# Altium PCB BSPD_V1.1.PcbDoc
Units mm, origin at the board's own origin, x right, y up, seen from the top; angles counter-clockwise.
Board outline 62 x 53 mm, 4 copper layers (Top Copper, Signal Layer 1, Signal Layer 2, Bottom Copper), stack 1.57 mm thick; 59 components, 38 nets, 194 pads, 116 vias.
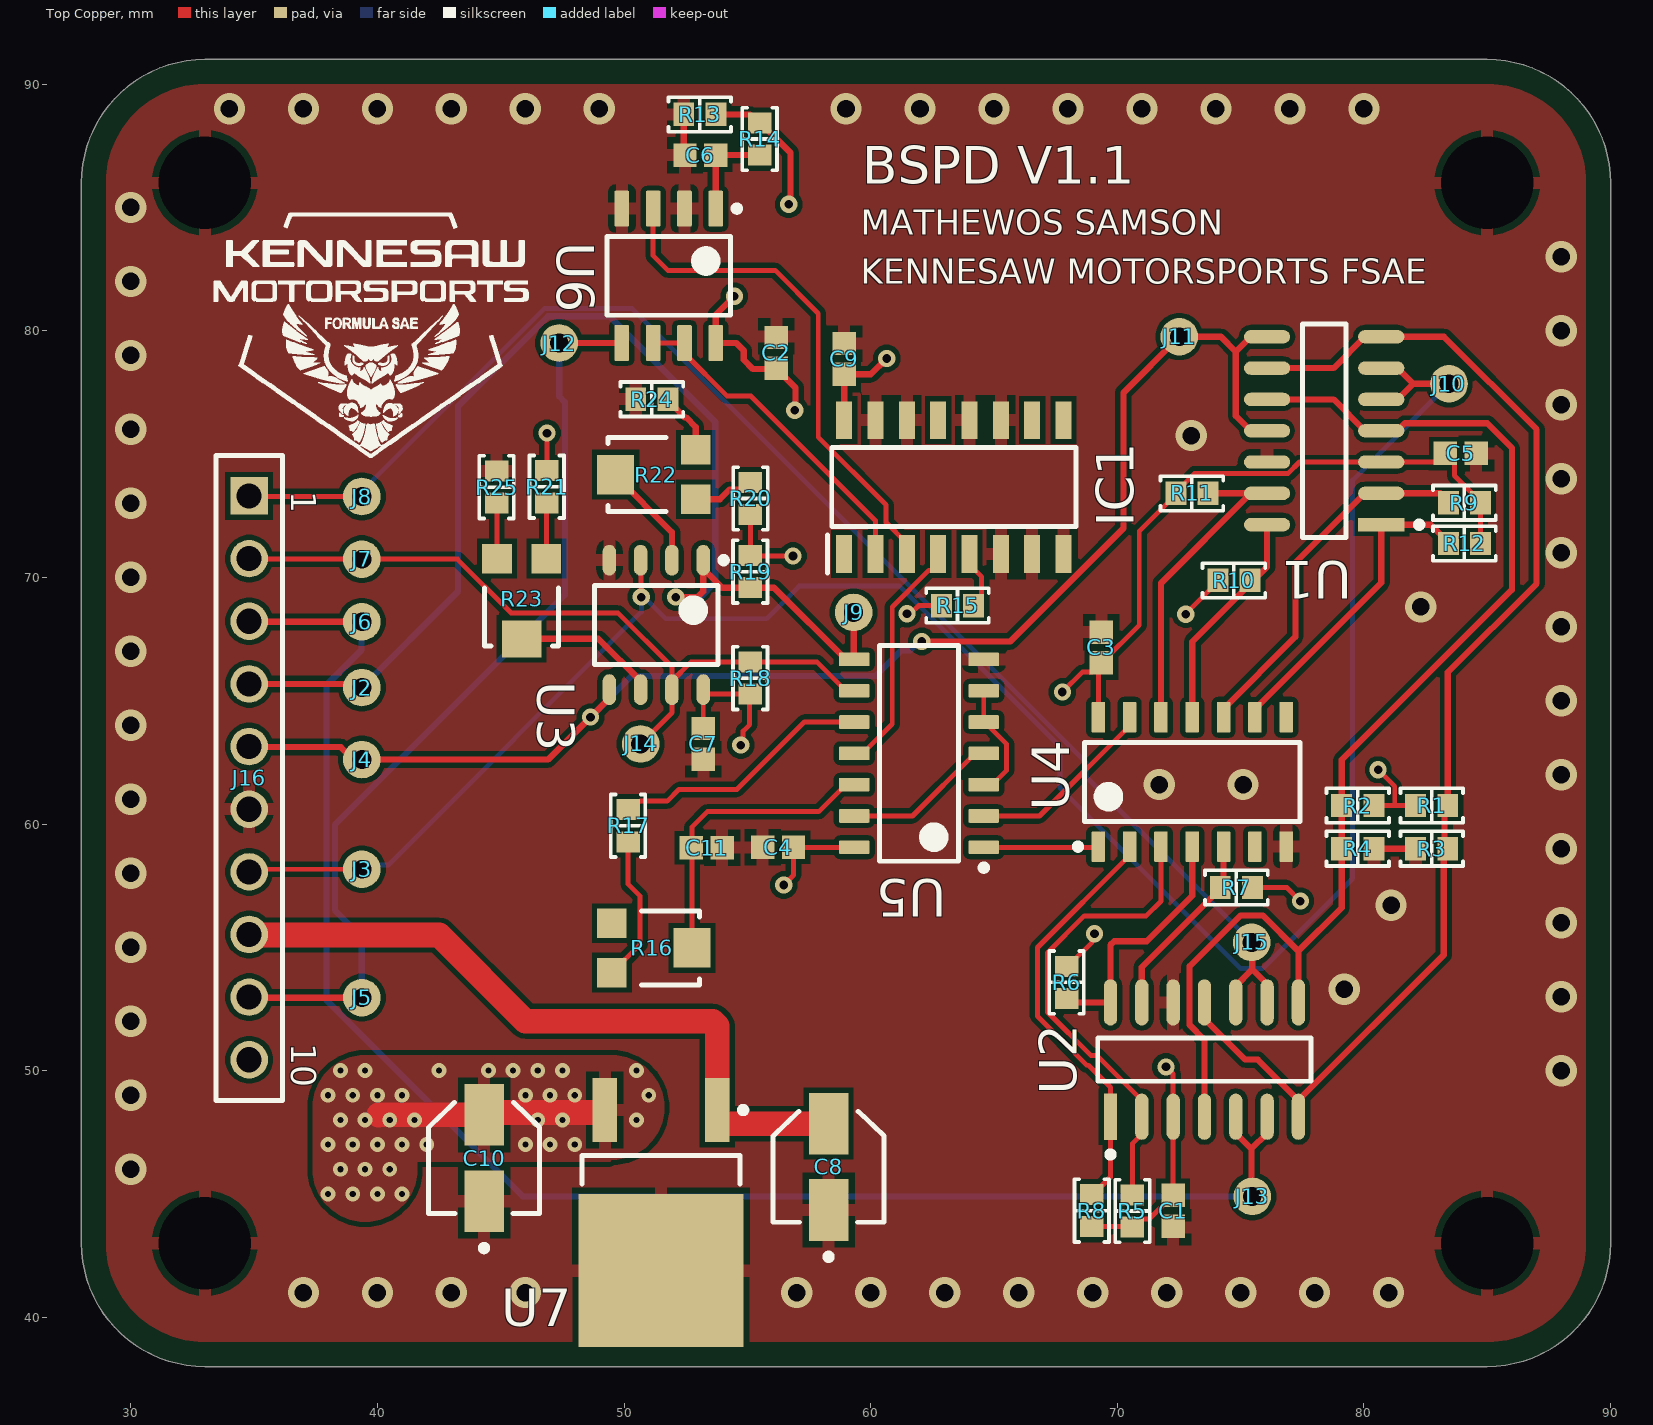
[diagram p0: Top Copper view]
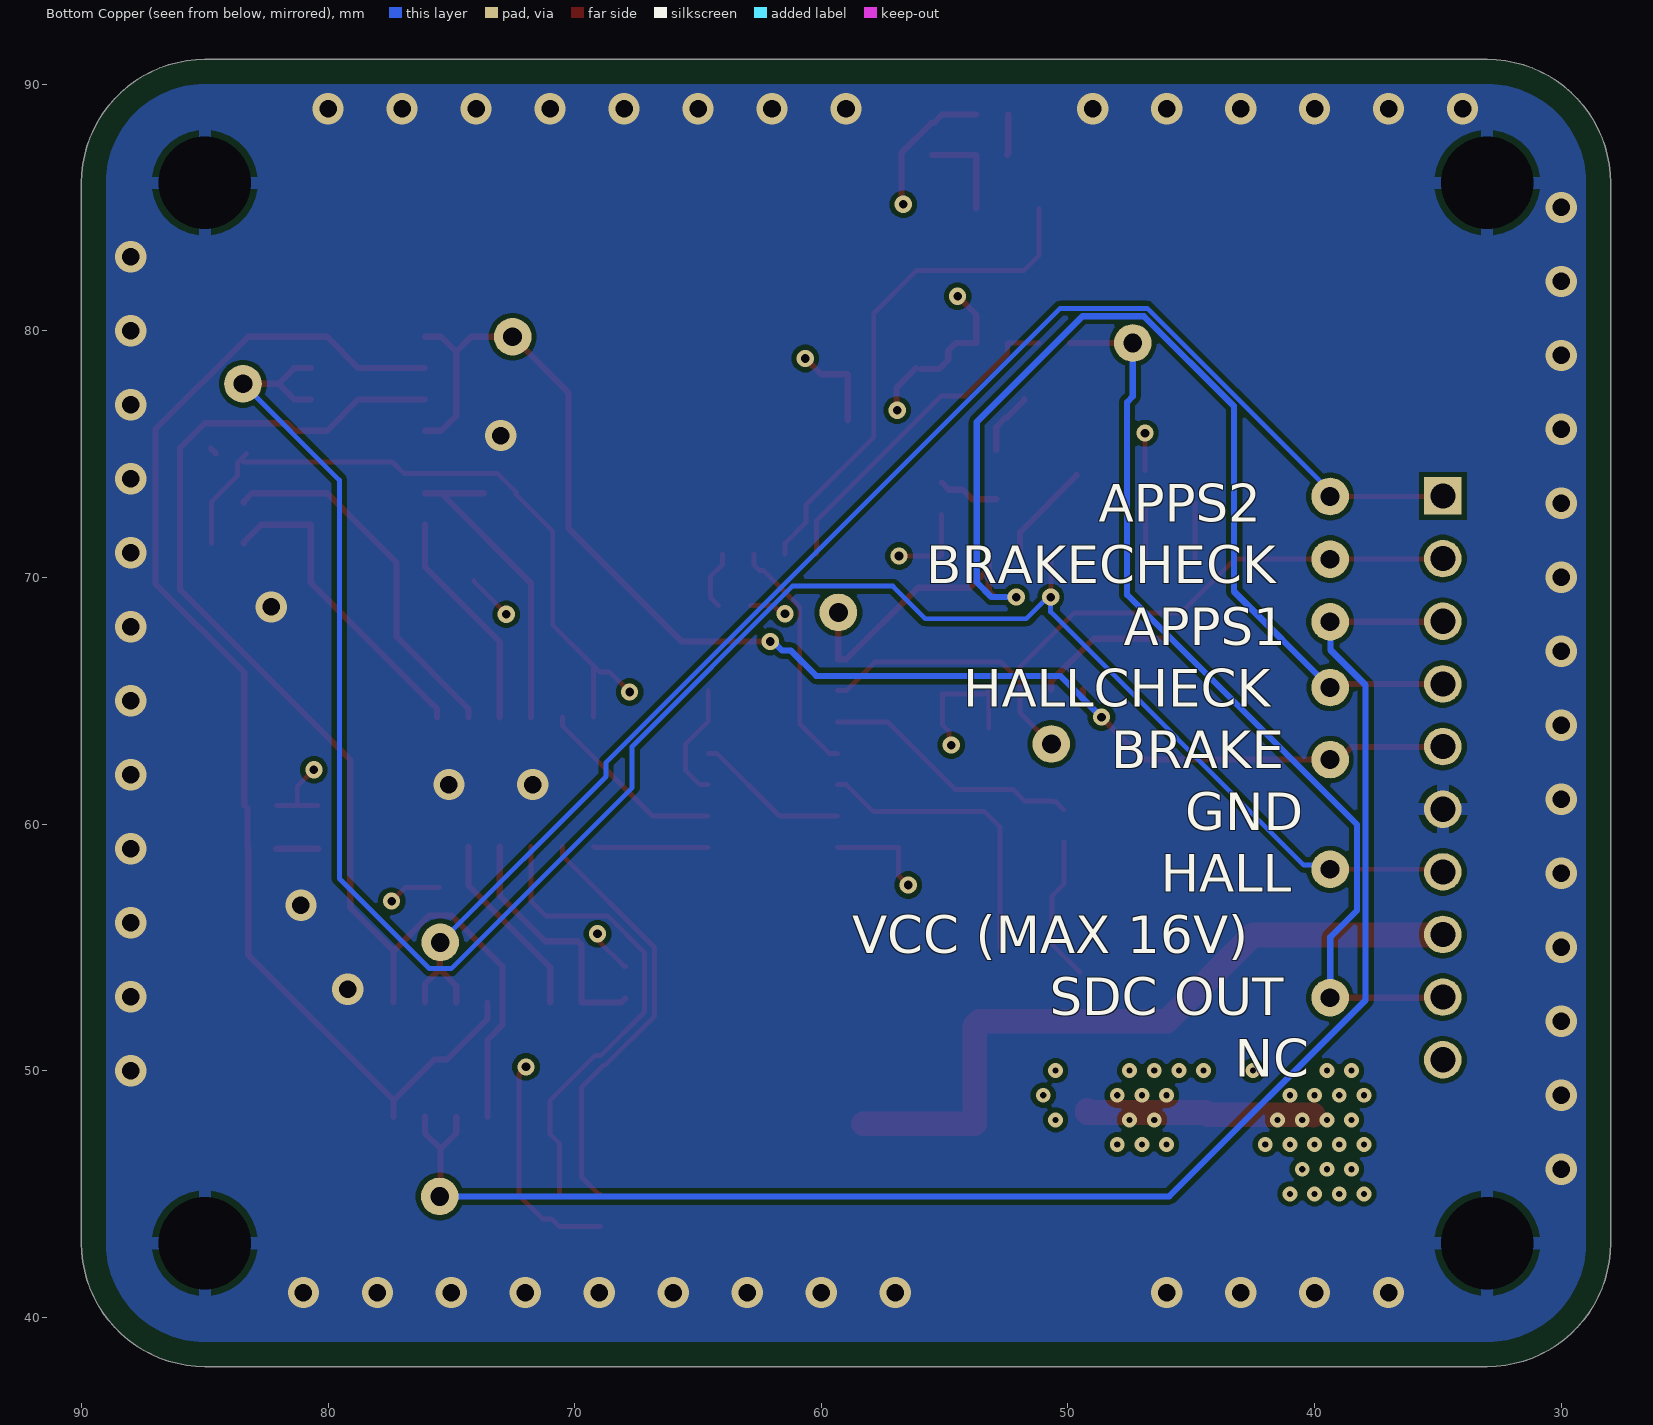
[diagram p1: Bottom Copper view, seen from below]
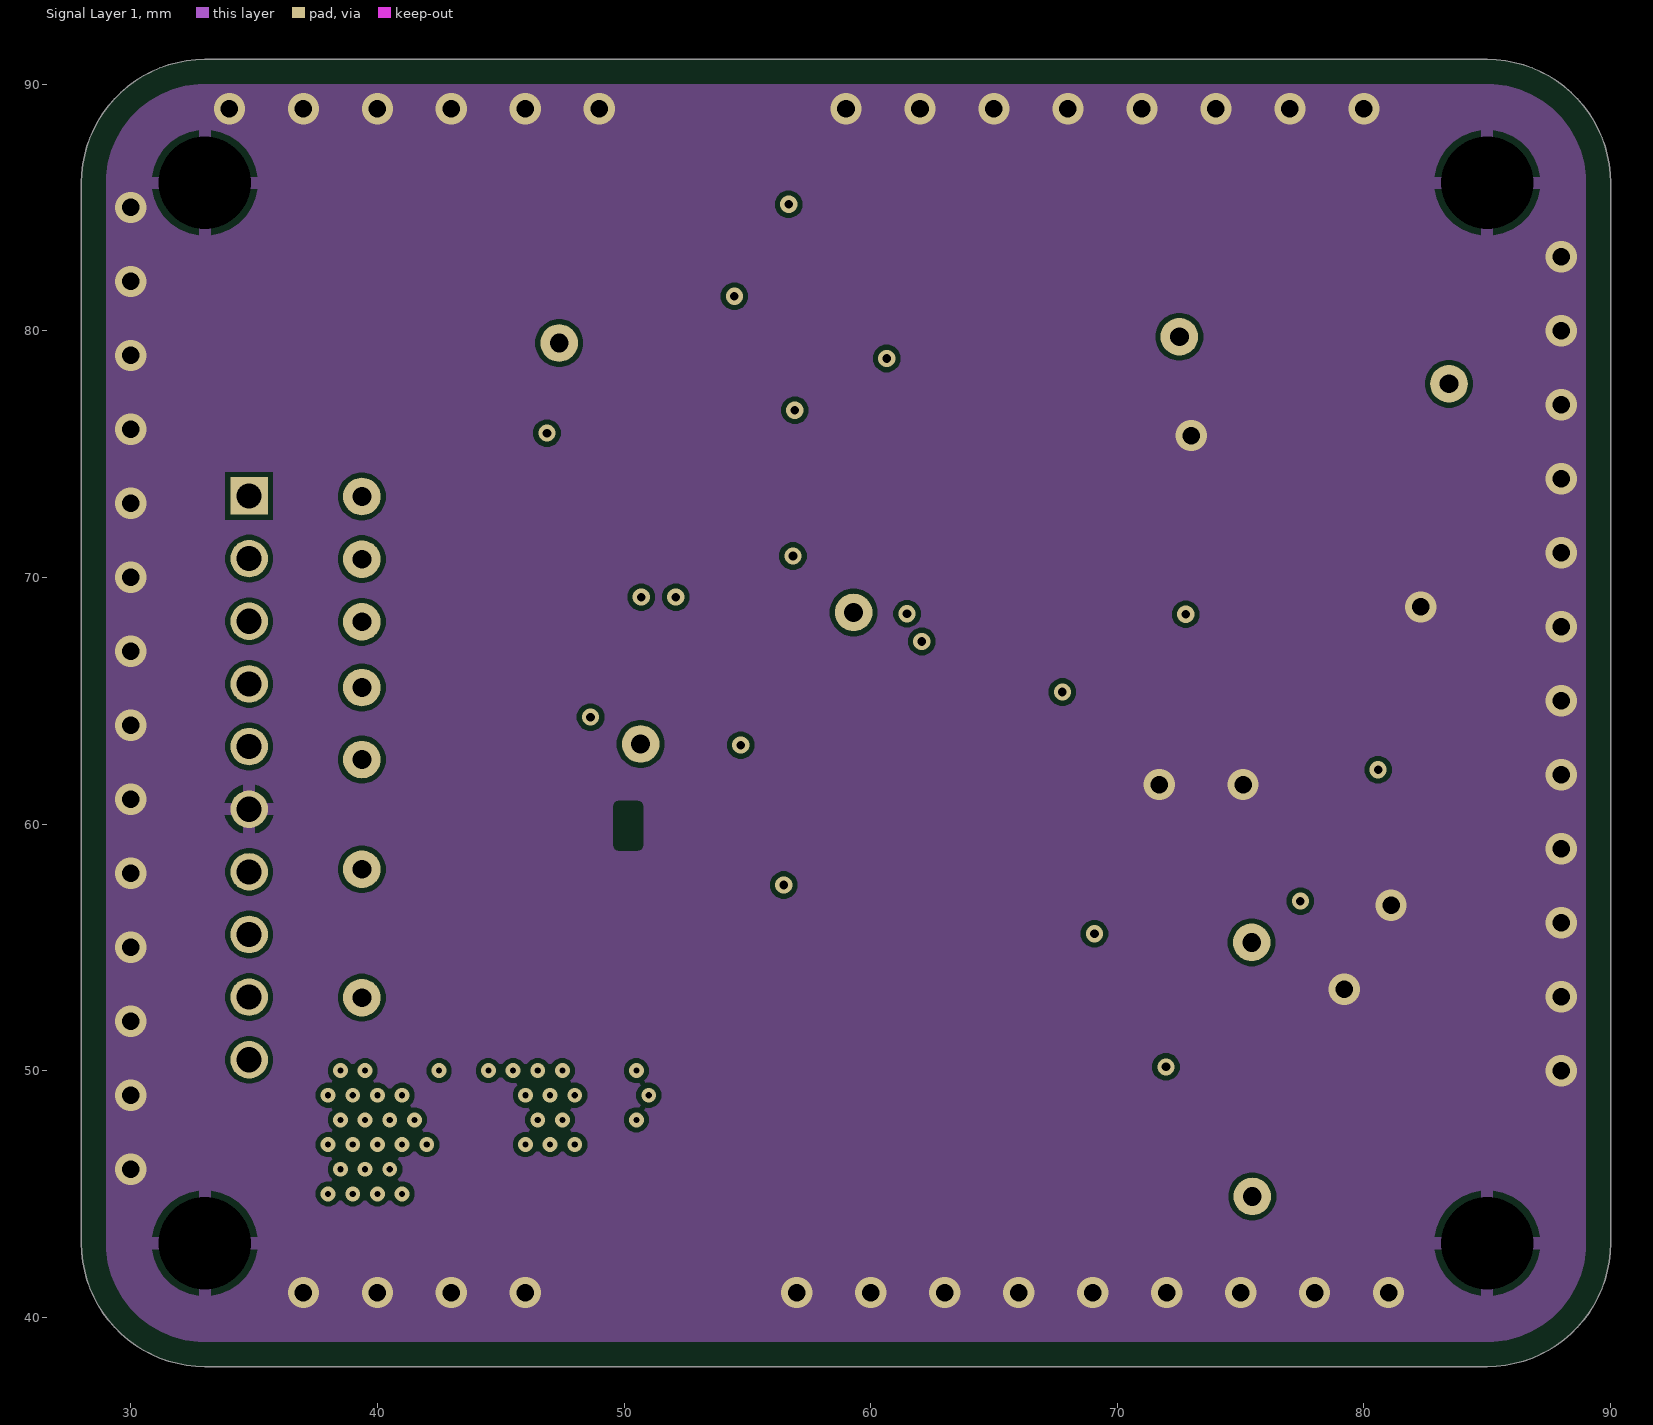
[diagram p2: Signal Layer 1]
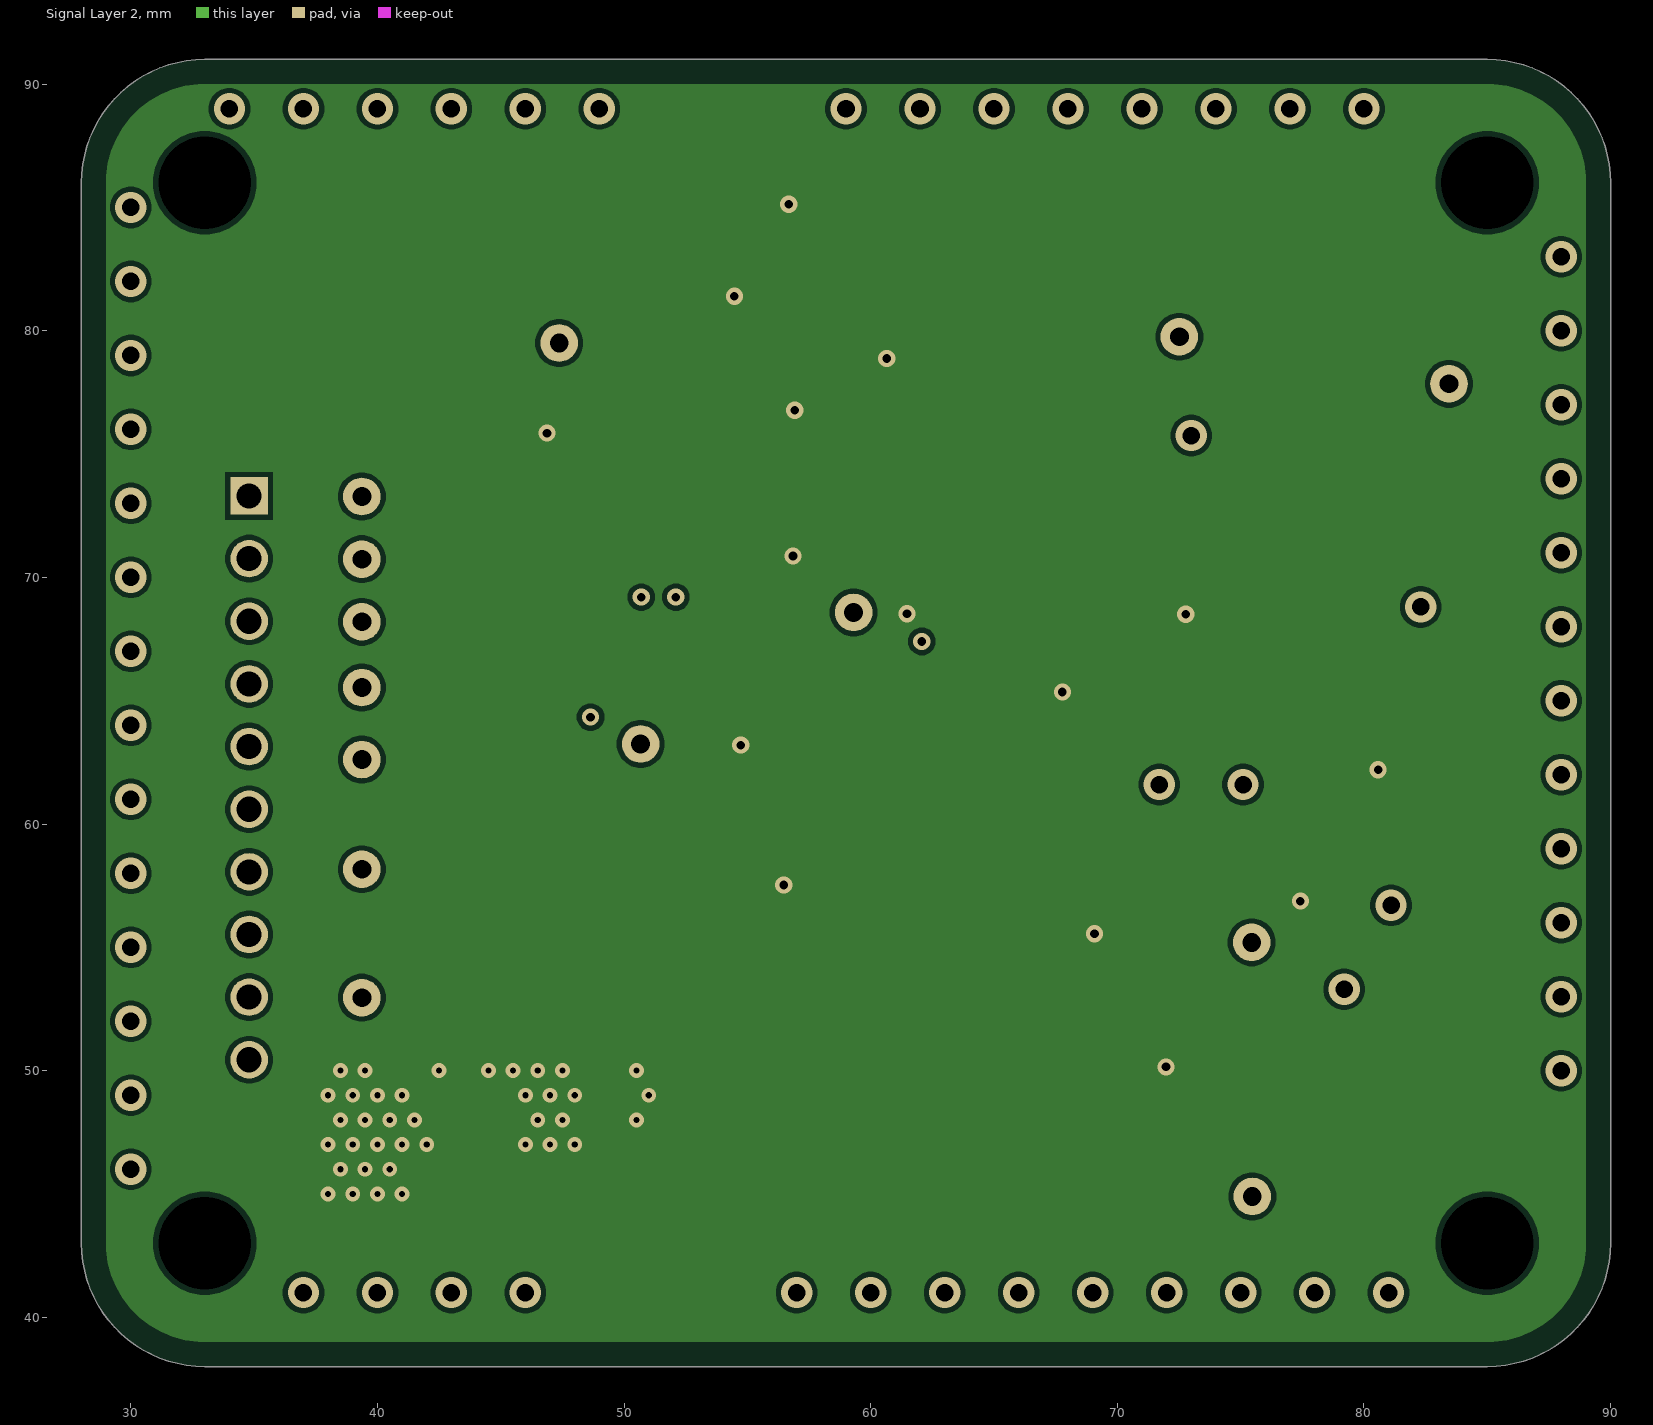
[diagram p3: Signal Layer 2]
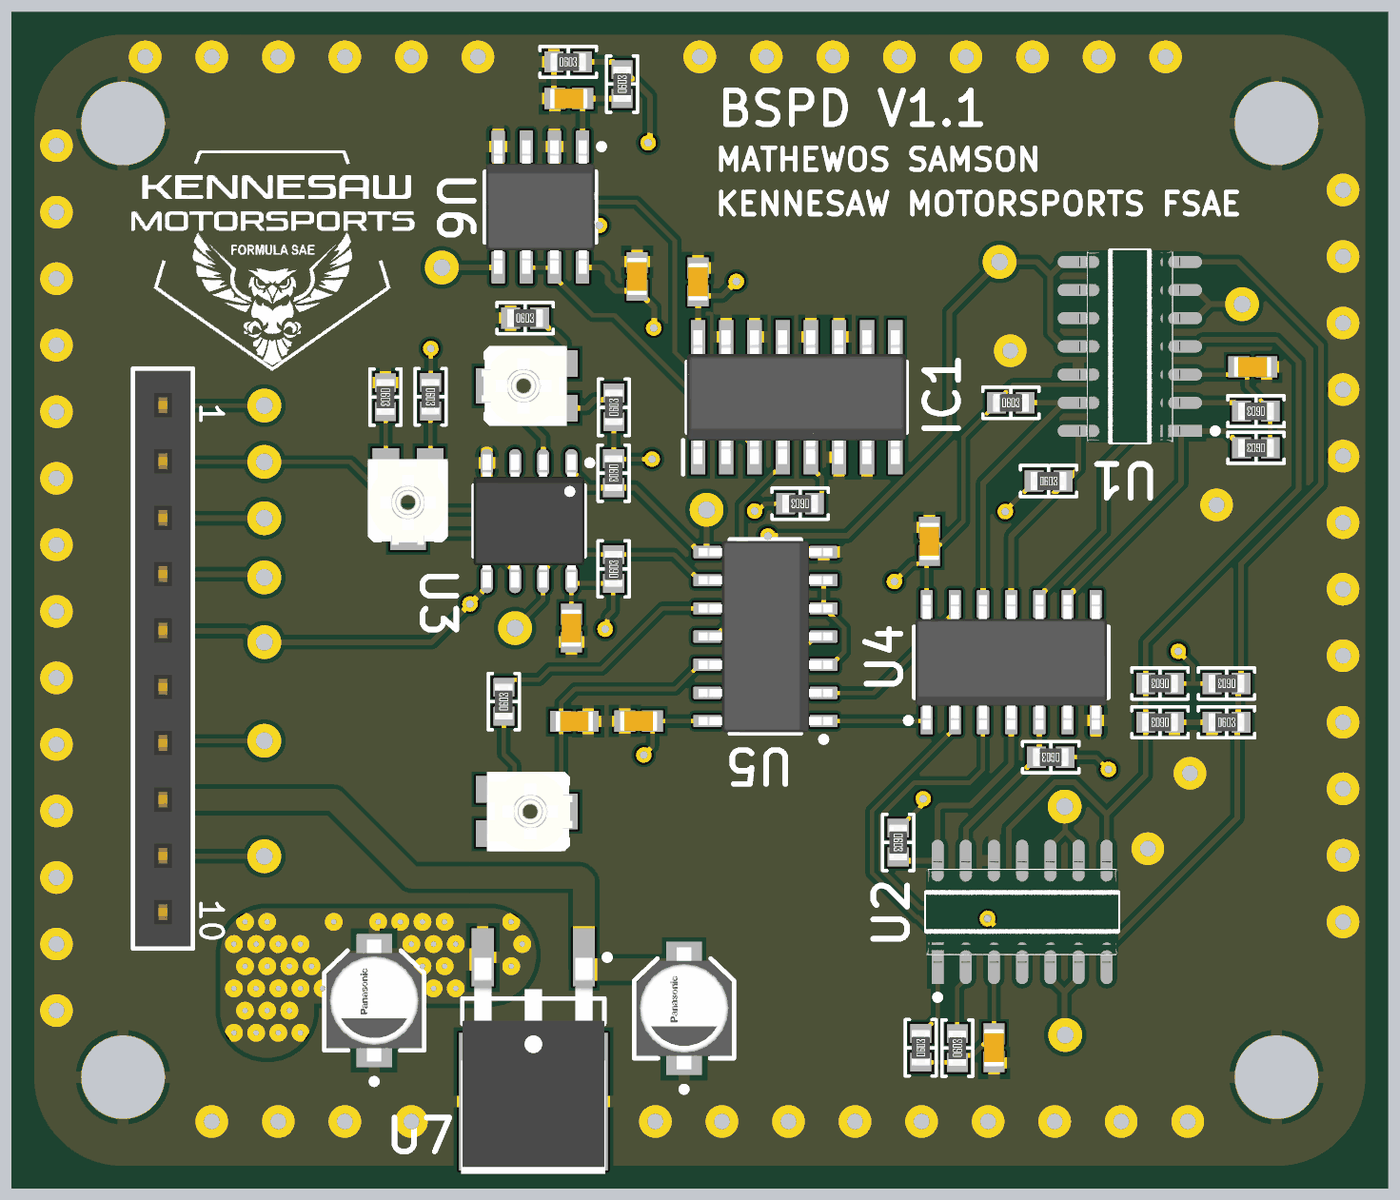
[diagram p4: 3D render of the assembled board from above, using the file's embedded part models]

## Layer stack, top to bottom
Top Mask: solder mask 0.015, Solder Resist, Dk 3.8
Top Copper: signal copper 0.035
Dielectric 1: prepreg 0.1, 2313, Dk 4.05
Signal Layer 1: signal copper 0.0175
Core: core 1.265, FR-4, Dk 4.5
Signal Layer 2: signal copper 0.0175
Dielectric 2: prepreg 0.1, 2313, Dk 4.05
Bottom Copper: signal copper 0.035
Bottom Mask: solder mask 0.015, Solder Resist, Dk 3.8

## Board outline
33,38 cw(c33,43) 28,43 28,86 cw(c33,86) 33,91 85,91 cw(c85,86) 90,86 90,43 cw(c85,43) 85,38

## Design rules (kind name [scope] priority, off if disabled: settings)
BoardOutlineClearance [All] p1: gap=0.2 ignorepadtopadclearanceinfootprint=FALSE except(0.4: Arc-SplitBarrior Arc-SplitContinuation Track-SplitBarrior Track-SplitContinuation SMDPad-SplitBarrior SMDPad-SplitContinuation THPad-SplitBarrior THPad-SplitContinuation Via-SplitBarrior Via-SplitContinuation Fill-SplitBarrior Fill-SplitContinuation Poly-SplitBarrior Poly-SplitContinuation Region-SplitBarrior Region-SplitContinuation Text-SplitBarrior Text-SplitContinuation)
Clearance "Clearance Bottom Layer" [OnLayer('Bottom Layer')] p1: gap=0.203 ignorepadtopadclearanceinfootprint=TRUE except(0.254: Arc-Text Track-Text SMDPad-Text THPad-Text Via-Text Fill-Text Poly-Text Region-Text Text-Text)
Clearance "Clearance Top Layer" [OnLayer('Top Layer')] p2: gap=0.203 ignorepadtopadclearanceinfootprint=TRUE except(0.254: Arc-Text Track-Text SMDPad-Text THPad-Text Via-Text Fill-Text Poly-Text Region-Text Text-Text)
Clearance [All] p3: gap=0.2 ignorepadtopadclearanceinfootprint=FALSE except(0.089: Arc-Arc Arc-Track Arc-SMDPad Track-Track Track-SMDPad SMDPad-SMDPad; 0.127: Arc-Via Track-Via SMDPad-Via THPad-Via Via-Via; 0.254: Arc-Text Track-Text SMDPad-Text THPad-Text Via-Text Fill-Text Poly-Text Region-Text Text-Text)
HoleSize [All] p1: absolutevalues=TRUE maxlimit=6.3 minlimit=0.2 maxpercent=80.000 minpercent=20.000
MinimumAnnularRing [All] p1: minimumring=0.076
MinimumSolderMaskSliver [All] p1: minsoldermaskwidth=0.1
PolygonConnect PolygonConnect_1 [All] p1: thpad.connectstyle=Relief thpad.reliefconductorwidth=0.508 thpad.reliefentries=4 thpad.polygonreliefangle="90 Angle" thpad.airgapwidth=0.254 smdpad.connectstyle=Relief smdpad.reliefconductorwidth=0.508 smdpad.reliefentries=4 smdpad.polygonreliefangle="90 Angle" smdpad.airgapwidth=0.254 via.connectstyle=Direct via.reliefconductorwidth=0.508 via.reliefentries=4 via.polygonreliefangle="90 Angle" via.airgapwidth=0.254
RoutingCorners [All] p1: cornerstyle=Round minsetback=2.54 maxsetback=2.54
RoutingVias [All] p1: holewidth=0.5 width=1 viastyle="Through Hole" minholewidth=0.2 minwidth=0.45 maxholewidth=1 maxwidth=2
SilkToSilkClearance [All] p1: silktosilkclearance=0.1
SilkToSolderMaskClearance [IsPad] p1: minsilkscreentomaskgap=0.1 clearancetoexposedcopper=TRUE
SolderMaskExpansion [All] p1: expansion=0.102 istentingtop=FALSE
Width [All] p1: maxlimit=2.54 minlimit=0.089 preferedwidth=0.381
25 further rules are at their usual default settings.

## Classes and differential pairs
component class Sheet3: J2 J3 J4 J5 J6 J7 J8 J9 J10 J11 J12 J13 J14 J15
component class U_Sheet2: J16
component class U_BSPD_V1.1: C1 C2 C3 C4 C5 C6 C7 C8 C9 C10 C11 IC1 R1 R2 R3 R4 R5 R6 R7 R8 R9 R10 R11 R12 R13 R14 R15 R16 R17 R18 R19 R20 R21 R22 R23 R24 R25 U1 U2 U3 U4 U5 U6 U7

## Components (designator, comment, footprint, x,y, rotation, side; value= is the part's Value field where it differs from the comment)
C1 "Capacitor 100 nF +/-10% 50 V 0603" CAPC1608X90X40NL10T20 72.264,44.323 r270 top value=100nF
C2 "Capacitor 100 nF +/-10% 50 V 0603" CAPC1608X90X40NL10T20 56.175,79.1 r90 top value=100nF
C3 "Capacitor 100 nF +/-10% 50 V 0603" CAPC1608X90X40NL10T20 69.358,67.157 r90 top value=100nF
C4 "Capacitor 100 nF +/-10% 50 V 0603" CAPC1608X90X40NL10T20 56.246,59.055 r180 top value=100nF
C5 "Capacitor 100 nF +/-10% 50 V 0603" CAPC1608X90X40NL10T20 83.925,75.025 r0 top value=100nF
C6 "Capacitor 100 nF +/-10% 50 V 0603" CAPC1608X90X40NL10T20 53.096,87.122 r0 top value=10uF
C7 "Capacitor 100 nF +/-10% 50 V 0603" CAPC1608X90X40NL10T20 53.213,63.246 r270 top value=100nF
C8 "EEEFK1E100R" FP-FKB-MFG 58.293,46.101 r90 top
C9 "Capacitor 100 nF +/-10% 50 V 0603" CAPC1608X90X40NL10T20 58.928,78.857 r90 top value=100nF
C10 "EEEFK1E100R" FP-FKB-MFG 44.323,46.454 r90 top
C11 "Capacitor 100 nF +/-10% 50 V 0603" CAPC1608X90X40NL10T20 53.35,59.04 r0 top value=10uF
IC1 "CD4043BD" SOIC127P600X175-16N 63.373,73.66 r90 top
J2 "22AWG JUMPER" "22 AWG Hole" 39.37,65.532 r0 top
J3 "22AWG JUMPER" "22 AWG Hole" 39.37,58.166 r0 top
J4 "22AWG JUMPER" "22 AWG Hole" 39.37,62.611 r0 top
J5 "22AWG JUMPER" "22 AWG Hole" 39.37,52.959 r0 top
J6 "22AWG JUMPER" "22 AWG Hole" 39.37,68.199 r0 top
J7 "22AWG JUMPER" "22 AWG Hole" 39.37,70.739 r0 top
J8 "22AWG JUMPER" "22 AWG Hole" 39.37,73.279 r0 top
J9 "22AWG JUMPER" "22 AWG Hole" 59.309,68.58 r90 top
J10 "22AWG JUMPER" "22 AWG Hole" 83.45,77.85 r180 top
J11 "22AWG JUMPER" "22 AWG Hole" 72.517,79.756 r90 top
J12 "22AWG JUMPER" "22 AWG Hole" 47.371,79.502 r180 top
J13 "22AWG JUMPER" "22 AWG Hole" 75.475,44.9 r180 top
J14 "22AWG JUMPER" "22 AWG Hole" 50.673,63.246 r180 top
J15 "22AWG JUMPER" "22 AWG Hole" 75.45,55.2 r180 top
J16 "61301011821" 61301011821 34.8,61.87 r270 top
R1 "10 kOhms" "RES 0603_1608" 82.75,60.75 r180 top
R2 "442 Ohms" "RES 0603_1608" 79.75,60.75 r180 top
R3 "442 Ohms" "RES 0603_1608" 82.75,59 r0 top
R4 "10 kOhms" "RES 0603_1608" 79.75,59 r180 top
R5 "5K" "RES 0603_1608" 70.613,44.308 r90 top
R6 "5K" "RES 0603_1608" 67.946,53.579 r270 top
R7 "5K" "RES 0603_1608" 74.825,57.425 r180 top
R8 "5K" "RES 0603_1608" 68.962,44.323 r90 top
R9 "5K" "RES 0603_1608" 84.074,73.025 r180 top
R10 "5K" "RES 0603_1608" 74.725,69.875 r0 top
R11 "5K" "RES 0603_1608" 73.025,73.406 r0 top
R12 "5K" "RES 0603_1608" 84.074,71.374 r180 top
R13 "500k" "RES 0603_1608" 53.071,88.773 r0 top
R14 "100K" "RES 0603_1608" 55.499,87.772 r90 top
R15 "5K" "RES 0603_1608" 63.524,68.858 r180 top
R16 "10 kOhms" "POT BOURNS TRIMPOT TC33" 51.308,54.976 r270 top
R17 "50K" "RES 0603_1608" 50.165,59.929 r90 top
R18 "5K" "RES 0603_1608" 55.118,65.913 r90 top
R19 "5K" "RES 0603_1608" 55.118,70.231 r270 top
R20 "5K" "RES 0603_1608" 55.125,73.2 r90 top
R21 "5K" "RES 0603_1608" 46.863,73.675 r270 top
R22 "10 kOhms" "POT BOURNS TRIMPOT TC33" 51.107,74.168 r90 top
R23 "10 kOhms" "POT BOURNS TRIMPOT TC33" 45.847,68.961 r180 top
R24 "5K" "RES 0603_1608" 51.125,77.225 r0 top
R25 "5K" "RES 0603_1608" 44.831,73.66 r270 top
U1 "LM139DR" FP-D0014A-IPC_C 78.389,75.946 r180 top
U2 "LM139DR" FP-D0014A-IPC_C 73.534,50.449 r90 top
U3 "LM393DT" STM-SO-8_D_L 51.308,68.072 r270 top
U4 "CD4002BM96" D0014A_L 73.041,61.706 r90 top
U5 "CD4011BM96" D0014A_L 61.961,62.865 r180 top
U6 "CD40107BM96" D0008A_N 51.816,82.228 r270 top
U7 "LF50ABDT-TRY" DPAK228P972X238-3N 51.5,44.25 r270 top

## Footprints (in the part's own frame and the unit in brackets; to place one, negate y for a bottom-side part, rotate by r counter-clockwise, add the part's x,y. Pads: shape width x height; smd on the part's side, far side on the other; paste and mask are expansions set on the pad)
"22 AWG Hole" [mil] "Solder 22awg or whatever wire fits into this"
  round 60 hole 30 mask+0: 1(0,0)
61301011821 [mm] "Socket Header, Pitch 2.54 mm, THT, Vertical, single row, 10p"
  rect 1.52x1.52 hole 1.02: 1(-11.43,0)
  round 1.52 hole 1.02: 2(-8.89,0) 3(-6.35,0) 4(-3.81,0) 5(-1.27,0) 6(1.27,0) 7(3.81,0) 8(6.35,0) 9(8.89,0) 10(11.43,0)
  silkscreen extent -13.08,-1.35 13.08,1.35, body extent -12.95,-1.25 12.95,1.25, height 8.55
CAPC1608X90X40NL10T20 [mm] "Chip Capacitor, 2-Leads, Body 1.70x0.90mm, IPC Medium Density"
  rect 0.95x0.95 smd: 1(-0.625,0) 2(0.625,0)
  body extent -0.85,-0.45 0.85,0.45, height 0.9
D0008A_N [mm] "SOIC, 8-Leads, Body 5x4mm, Pitch 1.27mm, IPC Medium Density"
  rrect17% 1.45x0.6 smd: 1(-2.725,1.905) 2(-2.725,0.635) 3(-2.725,-0.635) 4(-2.725,-1.905) 5(2.725,-1.905) 6(2.725,-0.635) 7(2.725,0.635) 8(2.725,1.905)
  silkscreen extent -2.85,-2.5 1.6,2.88, body extent -3,-2.45 3,2.45, height 1.63
D0014A_L [mm] "SOIC, 14-Leads, Body 8.75x4mm, Pitch 1.27mm, IPC High Density"
  rrect18% 1.25x0.55 smd: 1(-2.625,3.81) 2(-2.625,2.54) 3(-2.625,1.27) 4(-2.625,0) 5(-2.625,-1.27) 6(-2.625,-2.54) 7(-2.625,-3.81) 8(2.625,-3.81) 9(2.625,-2.54) 10(2.625,-1.27) 11(2.625,0) 12(2.625,1.27) 13(2.625,2.54) 14(2.625,3.81)
  silkscreen extent -2.75,-4.38 1.6,4.76, body extent -3.02,-4.32 3.02,4.32, height 1.59
DPAK228P972X238-3N [mm] "D-PAK, 3-Pads, Body 6.40x6.56mm (max), IPC Medium Density"
  rect 2.6x1 smd: 1(-4.15,2.28) 3(-4.15,-2.28)
  rect 6.2x6.7 smd: 4(2.35,0)
  silkscreen extent -4.27,-3.2 -1.15,3.46, body extent -4.12,-3.25 5.6,3.25, height 3.28
FP-D0014A-IPC_C [mm]
  rect 1.874x0.542 smd paste+0 mask+0: 1(-2.316,3.81)
  rrect100% 1.874x0.542 smd paste+0 mask+0: 2(-2.316,2.54) 3(-2.316,1.27) 4(-2.316,0) 5(-2.316,-1.27) 6(-2.316,-2.54) 7(-2.316,-3.81) 8(2.316,-3.81) 9(2.316,-2.54) 10(2.316,-1.27) 11(2.316,0) 12(2.316,1.27) 13(2.316,2.54) 14(2.316,3.81)
  silkscreen extent -3.98,-4.33 0.88,4.33, body extent -3.35,-4.43 3.35,4.43, height 0.25
FP-FKB-MFG [mm]
  rect 2.5x1.6 smd paste+0 mask+0: 1(-1.75,0) 2(1.75,0)
  silkscreen extent -3.77,-2.25 2.25,2.25, body extent -3.25,-2.5 3.25,2.5, height 0.25
"POT BOURNS TRIMPOT TC33" [mm] "Bourns Trimpot TC33X-1 - Open Frame 3mm x 3.8mm x 1.2mm"
  rect 1.2x1.2 smd: 1(-1,-1.8) 3(1,-1.8)
  rect 1.6x1.5 smd: 2(0,1.45)
  silkscreen extent -1.5,-0.6 1.5,1.75, body extent -1.8,-1.91 1.8,1.95, height 1.15
"RES 0603_1608" [mm] "Chip Resistor, 2-Leads, Body 1.60x0.80mm, IPC Medium Density"
  rect 0.85x0.95 smd: 1(-0.65,0) 2(0.65,0)
  silkscreen extent -1.27,-0.7 1.27,0.7, body extent -0.8,-0.4 0.8,0.4, height 0.45
SOIC127P600X175-16N [mm]
  rect 1.525x0.65 smd: 1(-2.712,4.445) 2(-2.712,3.175) 3(-2.712,1.905) 4(-2.712,0.635) 5(-2.712,-0.635) 6(-2.712,-1.905) 7(-2.712,-3.175) 8(-2.712,-4.445) 9(2.712,-4.445) 10(2.712,-3.175) 11(2.712,-1.905) 12(2.712,-0.635) 13(2.712,0.635) 14(2.712,1.905) 15(2.712,3.175) 16(2.712,4.445)
  silkscreen extent -3.47,-4.95 1.6,5.12, body extent -3.01,-4.94 3.01,4.96, height 1.75
STM-SO-8_D_L [mm] "SOIC, 8-Leads, Body 5x4mm, Pitch 1.27mm, IPC High Density"
  oval 1.25x0.55 smd: 1(-2.625,1.905) 2(-2.625,0.635) 3(-2.625,-0.635) 4(-2.625,-1.905) 5(2.625,-1.905) 6(2.625,-0.635) 7(2.625,0.635) 8(2.625,1.905)
  silkscreen extent -2.75,-2.5 1.6,2.86, body extent -3,-2.5 3,2.5, height 1.75

## Part data
C1 C2 C3 C4 C5 C6 C7 C9 C11: library part CMP-001-00017-6, "Chip Capacitor, 100 nF, +/- 10%, 50 V, 0603 (1608 Metric)", Capacitor Type=Ceramic, Case/Package=0603, Max Operating Temperature=125°C, Min Operating Temperature=-55°C, Tolerance=10%, Voltage Rating=50V, Mounting Technology=SM, Pins=2, RoHS Compliant=True
C8 C10: library part CMP-05427-000055-1, "CAP ALUM 10UF 20% 25V SMD", Capacitance=10uF, Case/Package=Radial, Dielectric Material=Aluminium, ESR (Equivalent Series Resistance)=1.35R, Leakage Current=3uA, Max Operating Temperature=105°C, Min Operating Temperature=-55°C, Package Quantity=1, Ripple Current=90mA, Tolerance=20%, Voltage=25V, Construction=Cylindrical, Contact Plating=Tin, Diameter=4mm, Height=5.8mm, Height - Seated (Max)=0.24inch, Impedance=1.35R, Lead Free="Lead Free", Length=5.8mm, Life (Hours)=2000Hour, Mount="Surface Mount", Number of Pins=2, Packaging="Tape and Reel", Polarity=Polar, Radiation Hardening=No, REACH SVHC="No SVHC", Ripple Current (AC)=90mA, RoHS Compliant=Yes, Series=FK, Termination=SMD/SMT, Voltage Rating=25V, Voltage Rating (DC)=25V, Width=5.5mm
IC1: "Integrated Circuit", Manufacturer_Name="Texas Instruments", Mouser Part Number=595-CD4043BD, Arrow Part Number=CD4043BD, Arrow Price/Stock=https://www.arrow.com/en/products/cd4043bd/texas-instruments, Datasheet Link=http://www.ti.com/lit/gpn/CD4043B, Height=1.75mm, Manufacturer_Part_Number=CD4043BD, Mouser Price/Stock=https://www.mouser.co.uk/ProductDetail/Texas-Instruments/CD4043BD?qs=LSR%252BNeaw%2FwBT%2FmtVlwfGdg%3D%3D
J16: library part CMP-1502-01332-1, "THT Vertical Socket Header WR-PHD, Pitch 2.54 mm, Single Row, 10 pins", Contact Resistance=20mOhm, Manufacturer="Wurth Elektronik", Operating Temperature=-40to125degC, Rated Current=3A, Withstanding Voltage=500VAC, Working Voltage=250VAC, Datasheet URL=https://katalog.we-online.de/em/datasheet/6130xx11821.pdf, Gender=Female, Manufacturer URL=http://www.we-online.de, Mounting Technology=THT, Orientation=Vertical, Package Reference=61301011821, Packaging=Tray, Part Number=61301011821, Pin Number=10, Pitch=2.54mm, Publisher=WurthElektronik, Row Number=Single
R1 R4: library part CPF0603B10KE, "RES SMD 10K OHM 0.1% 1/16W 0603", Device Package="0603 (1608 Metric)", Manufacturer="TE Connectivity Passive Product", Operating Temperature="-55°C ~ 155°C", Power (Watts)="0.063W, 1/16W", Supplier Device Package=0603, Supplier Part Number 1=A119886CT-ND, Temperature Coefficient=±25ppm/°C, Tolerance=±0.1%, ComponentLink1Description=Datasheet, ComponentLink1URL=https://www.te.com/commerce/DocumentDelivery/DDEController?Action=srchrtrv&DocNm=1773200&DocType=DS&DocLang=English, ComponentLink2Description="DigiKey Link", ComponentLink2URL=http://digikey.com/product-detail/en/te-connectivity-passive-product/CPF0603B10KE/A119886CT-ND/4966484, Composition="Thin Film", Height - Seated (Max)="0.022\" (0.55mm)", LastUpdated="9/2/2020 1:10:25 AM", Lifecycle Status=Active, Minimum Order=1, Number of Terminations=2, Package / Case="0603 (1608 Metric)", Packaging=TapeAndReel, Part Number=CPF0603B10KE, Part Status=Active, PartId=4872, Price=0.09, Resistance="10 kOhms", Series="CPF, Neohm", Size / Dimension="0.061\" L x 0.031\" W (1.55mm x 0.80mm)", Supplier 1=DigiKey
R2 R3: library part RK73H1JTTD4420F, "RES 442 OHM 1% 1/8W 0603", Device Package="0603 (1608 Metric)", Manufacturer="KOA Speer Electronics, Inc.", Operating Temperature="-55°C ~ 155°C", Power (Watts)="0.125W, 1/8W", Ratings=AEC-Q200, Supplier Device Package=0603, Supplier Part Number 1=2019-RK73H1JTTD4420FCT-ND, Temperature Coefficient=±100ppm/°C, Tolerance=±1%, ComponentLink1Description=Datasheet, ComponentLink1URL=http://www.koaspeer.com/catimages/Products/RK73H/RK73H.pdf, ComponentLink2Description="DigiKey Link", ComponentLink2URL=http://digikey.com/product-detail/en/koa-speer-electronics-inc/RK73H1JTTD4420F/2019-RK73H1JTTD4420FCT-ND/9847257, Composition="Thick Film", Features="Automotive AEC-Q200, Moisture Resistant", Height - Seated (Max)="0.022\" (0.55mm)", LastUpdated="9/2/2020 1:09:26 AM", Lifecycle Status=Active, Minimum Order=1, Number of Terminations=2, Package / Case="0603 (1608 Metric)", Packaging=CutTape, Part Number=RK73H1JTTD4420F, Part Status=Active, PartId=26603, Price=0.10, Resistance="442 Ohms", Series=RK73H, Size / Dimension="0.063\" L x 0.031\" W (1.60mm x 0.80mm)", Supplier 1=DigiKey
R5 R6 R7 R8 R9 R10 R11 R12 R15 R18 R19 R20 R21 R24 R25: library part CRGP0603F5K6, "CRGP 0603 5K6 1%", Device Package="0603 (1608 Metric)", Manufacturer="TE Connectivity Passive Product", Operating Temperature="-55°C ~ 155°C", Power (Watts)="0.25W, 1/4W", Resistance="5.6 kOhms", Supplier Device Package=0603, Supplier Part Number 1=A130425CT-ND, Temperature Coefficient=±100ppm/°C, Tolerance=±1%, ComponentLink1Description=Datasheet, ComponentLink1URL=https://www.te.com/commerce/DocumentDelivery/DDEController?Action=srchrtrv&DocNm=9-1773463-9&DocType=DS&DocLang=English, ComponentLink2Description="DigiKey Link", ComponentLink2URL=http://digikey.com/product-detail/en/te-connectivity-passive-product/CRGP0603F5K6/A130425CT-ND/8578257, Composition="Thick Film", Features="Pulse Withstanding", Height - Seated (Max)="0.022\" (0.55mm)", LastUpdated="9/2/2020 1:09:50 AM", Lifecycle Status=Active, Minimum Order=1, Number of Terminations=2, Package / Case="0603 (1608 Metric)", Packaging=TapeAndReel, Part Number=CRGP0603F5K6, Part Status=Active, PartId=20907, Price=0.02, Series=CRGP, Size / Dimension="0.063\" L x 0.031\" W (1.60mm x 0.80mm)", Supplier 1=DigiKey
R13: library part CRGP0603F5K6, "CRGP 0603 5K6 1%", Device Package="0603 (1608 Metric)", Manufacturer="TE Connectivity Passive Product", Operating Temperature="-55°C ~ 155°C", Power (Watts)="0.25W, 1/4W", Supplier Device Package=0603, Supplier Part Number 1=A130425CT-ND, Temperature Coefficient=±100ppm/°C, Tolerance=±1%, ComponentLink1Description=Datasheet, ComponentLink1URL=https://www.te.com/commerce/DocumentDelivery/DDEController?Action=srchrtrv&DocNm=9-1773463-9&DocType=DS&DocLang=English, ComponentLink2Description="DigiKey Link", ComponentLink2URL=http://digikey.com/product-detail/en/te-connectivity-passive-product/CRGP0603F5K6/A130425CT-ND/8578257, Composition="Thick Film", Features="Pulse Withstanding", Height - Seated (Max)="0.022\" (0.55mm)", LastUpdated="9/2/2020 1:09:50 AM", Lifecycle Status=Active, Minimum Order=1, Number of Terminations=2, Package / Case="0603 (1608 Metric)", Packaging=TapeAndReel, Part Number=CRGP0603F5K6, Part Status=Active, PartId=20907, Price=0.02, Resistance=500k, Series=CRGP, Size / Dimension="0.063\" L x 0.031\" W (1.60mm x 0.80mm)", Supplier 1=DigiKey
R14: library part CRGP0603F5K6, "CRGP 0603 5K6 1%", Device Package="0603 (1608 Metric)", Manufacturer="TE Connectivity Passive Product", Operating Temperature="-55°C ~ 155°C", Power (Watts)="0.25W, 1/4W", Resistance=100KOHM, Supplier Device Package=0603, Supplier Part Number 1=A130425CT-ND, Temperature Coefficient=±100ppm/°C, Tolerance=±1%, ComponentLink1Description=Datasheet, ComponentLink1URL=https://www.te.com/commerce/DocumentDelivery/DDEController?Action=srchrtrv&DocNm=9-1773463-9&DocType=DS&DocLang=English, ComponentLink2Description="DigiKey Link", ComponentLink2URL=http://digikey.com/product-detail/en/te-connectivity-passive-product/CRGP0603F5K6/A130425CT-ND/8578257, Composition="Thick Film", Features="Pulse Withstanding", Height - Seated (Max)="0.022\" (0.55mm)", LastUpdated="9/2/2020 1:09:50 AM", Lifecycle Status=Active, Minimum Order=1, Number of Terminations=2, Package / Case="0603 (1608 Metric)", Packaging=TapeAndReel, Part Number=CRGP0603F5K6, Part Status=Active, PartId=20907, Price=0.02, Series=CRGP, Size / Dimension="0.063\" L x 0.031\" W (1.60mm x 0.80mm)", Supplier 1=DigiKey
R16 R22 R23: library part TC33X-2-103E, "TRIMMER 10K OHM 0.1W J LEAD TOP", Manufacturer="Bourns Inc.", Power (Watts)="0.1W, 1/10W", Resistive Material=Cermet, Supplier Part Number 1=TC33X-103ECT-ND, Temperature Coefficient=±250ppm/°C, Tolerance=±25%, Adjustment Type="Top Adjustment", ComponentLink1Description=Datasheet, ComponentLink1URL=https://www.bourns.com/docs/Product-Datasheets/TC33.pdf, ComponentLink2Description="DigiKey Link", ComponentLink2URL=http://digikey.com/product-detail/en/bourns-inc/TC33X-2-103E/TC33X-103ECT-ND/612911, LastUpdated="9/2/2020 1:21:42 AM", Lifecycle Status=Active, Minimum Order=1, Mounting Type="Surface Mount", Number of Turns=1, Packaging=TapeAndReel, Part Number=TC33X-2-103E, Part Status=Active, PartId=8, Price=0.15, Resistance="10 kOhms", Series="Trimpot® TC33 - Open Frame", Size / Dimension="Rectangular - 0.150\" x 0.142\" Face x 0.047\" H (3.80mm x 3.60mm x 1.20mm)", Supplier 1=DigiKey, Termination Style="J Lead"
R17: library part CRGP0603F5K6, "CRGP 0603 5K6 1%", Device Package="0603 (1608 Metric)", Manufacturer="TE Connectivity Passive Product", Operating Temperature="-55°C ~ 155°C", Power (Watts)="0.25W, 1/4W", Resistance=50KOHM, Supplier Device Package=0603, Supplier Part Number 1=A130425CT-ND, Temperature Coefficient=±100ppm/°C, Tolerance=±1%, ComponentLink1Description=Datasheet, ComponentLink1URL=https://www.te.com/commerce/DocumentDelivery/DDEController?Action=srchrtrv&DocNm=9-1773463-9&DocType=DS&DocLang=English, ComponentLink2Description="DigiKey Link", ComponentLink2URL=http://digikey.com/product-detail/en/te-connectivity-passive-product/CRGP0603F5K6/A130425CT-ND/8578257, Composition="Thick Film", Features="Pulse Withstanding", Height - Seated (Max)="0.022\" (0.55mm)", LastUpdated="9/2/2020 1:09:50 AM", Lifecycle Status=Active, Minimum Order=1, Number of Terminations=2, Package / Case="0603 (1608 Metric)", Packaging=TapeAndReel, Part Number=CRGP0603F5K6, Part Status=Active, PartId=20907, Price=0.02, Series=CRGP, Size / Dimension="0.063\" L x 0.031\" W (1.60mm x 0.80mm)", Supplier 1=DigiKey
U1 U2: library part CMP-04896-000042-1, "IC QUAD DIFF COMPARATOR 14-SOIC", Case/Package=SOIC, Dual Supply Voltage=9V, Input Bias Current=100nA, Input Offset Voltage (Vos)=5mV, Max Dual Supply Voltage=18V, Max Operating Temperature=125°C, Max Power Dissipation=1.19W, Max Supply Current=500uA, Max Supply Voltage=36V, Min Dual Supply Voltage=1V, Min Operating Temperature=-55°C, Min Supply Voltage=2V, Nominal Supply Current=2mA, Operating Supply Voltage=28V, Output Current=20mA, Output Current per Channel=6mA, Package Quantity=1, Voltage Gain=106.02dB, Contact Plating=Gold, Height=1.58mm, Lead Free="Lead Free", Length=8.65mm, Max Input Current=100nA, Mount="Surface Mount", Number Of Channels=4, Number of Elements=4, Number of Pins=14, Output Type=TTL, Packaging="Tape and Reel", Quiescent Current=2mA, Radiation Hardening=No, REACH SVHC="No SVHC", Response Time=0.3us, RoHS Compliant=Yes, Series=LM139, Supply Current=2mA, Technology=BIPOLAR, Weight=0.004515oz, Width=3.91mm
U3: library part CMP-2000-06550-1, "Low-Power, Dual-Voltage Comparator, 2 to 36 V, 0 to 70 degC, 8-Pin SOIC (SO), RoHS, Tape and Reel", Current - Input Bias (Max)=0.25µA@5V, Current - Output (Typ)=18mA@5V, Current - Quiescent (Max)=2.5mA, Manufacturer=STMicroelectronics, Operating Temperature=0°C~70°C, Package / Case="8-SOIC(0.154\",3.90mmWidth)", Package Description="8-Pin Small Outline Integrated Circuit, Body 4.9 x 3.9 mm, Pitch 1.27 mm", Package Reference=SO-8, Standard Package=2,500, Supplier Device Package=8-SO, Voltage - Input Offset (Max)=5mV@30V, Voltage - Supply, Single/Dual (±)=2V~36V,±1V~18V, Category=IntegratedCircuits(ICs), Datasheet URL=http://www.st.com/content/ccc/resource/technical/document/datasheet/group1/b4/cc/cf/13/18/28/44/f5/CD00000465/files/CD00000465.pdf/jcr:content/translations/en.CD00000465.pdf, Datasheet Version="Rev. 15, 02/2016", EDA / CAD Models=DownloadfromAcceleratedDesigns, Family=Linear-Comparators, Manufacturer URL=http://www.st.com/, Mounting Technology=SurfaceMount, Mounting Type=SurfaceMount, Number of Elements=2, Online Catalog=Comparators-2elements, Other Names=497-1593-2, Other Related Documents=LM393ViewAllSpecificationsLM393ViewAllSpecifications, Output Type=CMOS,DTL,ECL,MOS,Open-Collector,TTL, Packaging=Tape&Reel(TR), Type=GeneralPurpose
U4: library part CMP-0806-00069-3, "CMOS Dual 4-Input NOR Gate, D0014A, LARGE T&R", F @ Nom Voltage(Max)(Mhz)=8, Generic Part Number=CD4002B, ICC @ Nom Voltage(Max)(mA)=0.015, Manufacturer="Texas Instruments", Operating Temperature Range(C)="-55 to 125", Rating=Catalog, tpd @ Nom Voltage(Max)(ns)=120, Voltage(Nom)(V)=10, Bits(#)=2, Code_JEDEC=MS-012, DatasheetVersion=SCHS015C, Input Type=CMOS, Output Drive (IOL/IOH)(Max)(mA)=1.5/-1.5, Output Type=CMOS, PackageReference=D0014A, PackageVersion=http://www.ti.com/lit/ml/mpds177g/mpds177g.pdf, VCC(Max)(V)=18, VCC(Min)(V)=3
U5: library part CMP-1627-00065-2, "CMOS Quad 2-Input NAND Gate, D0014A, LARGE T&R", F @ Nom Voltage(Max)(Mhz)=8, Generic Part Number=CD4011B, ICC @ Nom Voltage(Max)(mA)=0.015, Manufacturer="Texas Instruments", Operating Temperature Range(C)="-55 to 125", Rating=Military, Voltage(Nom)(V)=10, Bits(#)=4, Code_JEDEC=MS-012, DatasheetVersion=SCHS021D, Input Type=CMOS, Output Drive (IOL/IOH)(Max)(mA)=1.5/-1.5, Output Type=CMOS, PackageReference=D0014A, Schmitt Trigger=No, Technology Family=CD4000, VCC(Max)(V)=18, VCC(Min)(V)=3
U6: library part CMP-1627-00002-2, "CMOS Dual 2-Input NAND Buffer/Driver, D0008A, LARGE T&R", F @ Nom Voltage(Max)(Mhz)=8, Generic Part Number=CD40107B, ICC @ Nom Voltage(Max)(mA)=0.06, Manufacturer="Texas Instruments", Operating Temperature Range(C)="-55 to 125", Rating=Catalog, Voltage(Nom)(V)=10, Bits(#)=2, DatasheetVersion=SCHS098D, Input Type=CMOS, Output Drive (IOL/IOH)(Max)(mA)=0/-85, Output Type=CMOS, PackageReference=D0008A, Schmitt Trigger=No, Technology Family=CD4000, VCC(Max)(V)=18, VCC(Min)(V)=3
U7: "Linear Voltage Regulator IC Positive Fixed 1 Output 500mA DPAK"

## Free pads (board coordinates)
  round 1.524 hole 3.759: 2(33,43) 2(33,86) 2(85,43) 2(85,86)

## Via types
v1: diameter 1.27, hole 0.711, Top Copper to Bottom Copper, 59 vias
v2: diameter 0.6, hole 0.25, Top Copper to Bottom Copper, 38 vias
v3: diameter 0.7, hole 0.35, Top Copper to Bottom Copper, 19 vias

## Nets (pads, with @x,y where several pads share a name; then routed paths per layer and width w, separated by ;. In a path a pad name is that pad's centre, name@x,y a point inside that pad or via, vN(x,y) a via of type N, cw(c..) or ccw(c..) an arc to the next point about the centre after c; other vN are vias at no path point)
+0.2V: R1.1 R3.2 U1.7 U1.9 U2.7 U2.11 | length 50.5
  Top Copper w0.254: U2.11 73.534,52.099 75.184,50.449 75.694,50.449 U2.7@77.344,48.799 ; U1.9 78.769,78.486 80.039,79.756 U1.7 83.244,79.756 87,76 87,69.75 83.4,66.15 R1.1 ; U2.7 U2.7@77.344,48.799 ; R3.2@83.234,59.035 83.234,54.689 U2.7@77.344,48.799 ; R3.2@83.266,59.035 R1.1@83.266,60.641
+4.8V: R2.2 R4.2 U1.4 U1.10 U2.4 U2.8 | length 49.3
  Top Copper w0.254: U2.4 73.534,51.249 72.933,51.85 72.933,54.227 74.998,56.292 75.902,56.292 77.344,54.851 ; U1.10 78.769,77.216 80.039,75.946 81.36,75.946 81.664,76.25 85,76.25 86,75.25 86,69.5 79.1,62.6 R2.2 R4.2 79.1,56.607 77.344,54.851 ; U2.8 77.344,54.851
+5: C1.1 C2.1 C3.1 C4.1 C5.1 C7.1 C9.1 C10.2 IC1.16 R1.2 R2.1 R5.1 R6.1 R7.1 R8.1 R9.1 R10.1 R11.1 R12.1 R13.2 R14.2 R15.2 R18.1 R19.1 R20.1 R21.1 U1.3 U2.3 U3.8 U4.14 U5.14 U6.8 U7.3 | length 89.1
  Top Copper w0.2: R21.1 46.875,74.337 v3(46.875,75.85) ; C7.1 U3.8@53.213,65.425 ; U3.8 U3.8@53.213,65.425 ; v3(54.734,63.2) 54.83,63.296 54.83,63.765 55.091,64.027 55.091,65.236 R18.1 53.375,65.263 U3.8@53.213,65.425 ; R19.1 R19.1@55.125,70.888 ; R20.1 55.125,70.975 R19.1@55.125,70.888 ; v3(56.475,57.525) 56.871,57.921 C4.1 U5.14 ; v3(56.85,70.866) 55.147,70.866 R19.1@55.125,70.888 ; v3(61.475,68.525) 61.61,68.525 61.943,68.858 R15.2 ; v3(67.775,65.35) 68.582,66.157 68.983,66.157 C3.1@69.231,66.405 ; R6.1 67.996,54.229 68.979,55.212 68.979,55.454 v3(69.075,55.55) ; R8.1 70.598,43.673 R5.1 70.938,43.983 71.299,43.983 C1.1 U2.3 72.264,49.861 v3(71.975,50.15) ; U4.14 C3.1@69.231,66.405 ; v3(72.775,68.5) 72.775,68.525 74.075,69.825 R10.1 ; R7.1 76.875,57.425 v3(77.425,56.875) ; R2.1 81.25,60.75 ; v3(80.575,62.2) 81.25,61.525 81.25,60.75 ; R1.2 81.25,60.75 ; C5.1 83.675,74.65 83.675,74.124 84.724,73.075 R9.1 R12.1 ; C5.1@83.439,74.676 U1.3 77.389,74.676 76.929,74.216 73.135,74.216 72.375,73.456 R11.1 72.375,73.356 70.891,71.873 70.891,68.066 C3.1 C3.1@69.231,66.405
  Top Copper w0.254: R13.2 55.098,88.773 55.449,88.422 R14.2 55.549,88.422 56.75,87.221 56.75,85.2 v3(56.675,85.125) ; v3(54.475,81.4) 53.721,80.646 U6.8 54.547,79.503 54.85,79.2 54.85,78.825 55.225,78.45 C2.1@55.95,78.45 ; C2.1 56.95,77.7 56.95,76.8 v3(56.925,76.775) ; IC1.16 C9.1 60.007,78.232 v3(60.65,78.875)
  Top Copper w1: 40.05,48.2 40.054,48.204 C10.2 44.421,48.302 49.22,48.302 U7.3
  other v2: 38,45 39,45 40,45 41,45 38.5,46 39.5,46 40.5,46 38,47 39,47 40,47 41,47 42,47 46,47 47,47 48,47 38.5,48 39.5,48 40.5,48 41.5,48 46.5,48 47.5,48 50.5,48 38,49 39,49 40,49 41,49 46,49 47,49 48,49 51,49 38.5,50 39.5,50 42.5,50 44.5,50 45.5,50 46.5,50 47.5,50 50.5,50
APPS1: J6.1 J13.1 J16.3 U2.5 U2.6 | length 66.2
  Top Copper w0.254: J16.3@35.052,68.199 J6.1 ; U2.5 74.804,47.467 75.439,46.832 ; J13.1 75.439,44.936 75.439,46.832 ; U2.6 76.074,47.467 75.439,46.832
  Bottom Copper w0.254: J6.1 39.354,68.183 39.354,67.056 37.935,65.637 37.935,52.854 45.889,44.9 J13.1
APPS2: J8.1 J15.1 J16.1 U2.9 U2.10 | length 58.4
  Top Copper w0.2: J16.1@35.052,73.279 J8.1
  Top Copper w0.254: U2.10 74.804,53.431 75.475,54.102 ; J15.1@75.475,54.675 75.475,54.102 ; U2.9 76.074,53.503 75.475,54.102
  Bottom Copper w0.2: J8.1 39.37,73.488 46.789,80.907 50.318,80.907 68.726,62.499 68.726,61.924 J15.1
BRAKE: J4.1 J11.1 J16.5 U1.8 U1.11 U3.5 | length 57.6
  Top Copper w0.254: J16.5@35.052,63.119 38.518,63.119 39.026,62.611 J4.1 46.917,62.611 v3(48.64,64.335) 49.403,65.097 U3.5 ; v3(62.075,67.4) 65.663,67.4 70.253,71.99 70.253,77.492 J11.1 74.204,79.756 74.806,79.155 ; U1.11 75.407,75.946 74.806,76.547 74.806,79.155 ; U1.8 75.407,79.756 74.806,79.155
  Bottom Copper w0.254: v3(48.64,64.335) 50.309,66.003 60.203,66.003 61.231,67.031 61.585,67.031 61.954,67.4 v3(62.075,67.4)
BRAKECHECK: J7.1 J14.1 J16.2 R18.2 U3.7 U5.9 | length 30.8
  Top Copper w0.2: J16.2@34.8,70.739 J7.1 43.24,70.739 45.415,68.564 49.751,68.564 51.943,66.372 U3.7@51.943,65.797 ; J14.1 51.943,64.516 U3.7 U3.7@51.943,65.797 ; U5.9 58.986,65.405 57.828,66.563 R18.2 52.709,66.563 U3.7@51.943,65.797
BRAKEREF: R23.2 U3.6 | length 5.9
  Top Copper w0.254: R23.2 48.959,67.511 50.673,65.797 U3.6
BSP_CHECK: R17.2 U5.10 | length 10.6
  Top Copper w0.2: R17.2 50.49,60.904 50.636,60.904 50.657,60.925 51.75,60.925 52.225,61.4 54.575,61.4 57.31,64.135 U5.10
BSP_CHECK_DELAY: C11.1 R16.2 U5.12 | length 12.2
  Top Copper w0.2: R16.2 52.758,59.007 C11.1 52.75,59.065 52.75,59.875 53.375,60.5 57.891,60.5 58.986,61.595 U5.12
GND: C1.2 C2.2 C3.2 C4.2 C5.2 C6.1 C7.2 C8.1 C9.2 C10.1 C11.2 IC1.6 IC1.7 IC1.8 IC1.11 IC1.12 IC1.14 IC1.15 J16.6 pad.2 R3.1 R4.1 R13.1 R24.1 R25.1 U1.12 U2.12 U3.4 U4.7 U5.7 U6.2 U6.4 U7.4 | length 3.7
  Top Copper w0.254: R13.1 52.421,87.172 C6.1 ; R4.1 R3.1 ; C5.2 C5.2@84.749,75.224
  other v1: 37,41 40,41 43,41 46,41 57,41 60,41 63,41 66,41 69,41 72,41 75,41 78,41 81,41 30,46 30,49 88,50 30,52 88,53 79.2,53.3 30,55 88,56 81.1,56.7 30,58 88,59 30,61 71.7,61.6 75.1,61.6 88,62 30,64 88,65 30,67 88,68 82.3,68.8 30,70 88,71 30,73 88,74 73,75.75 30,76 88,77 30,79 88,80 30,82 88,83 30,85 34,89 37,89 40,89 43,89 46,89 49,89 59,89 62,89 65,89 68,89 71,89 74,89 77,89 80,89
HALL: J3.1 J10.1 J16.7 U1.5 U1.6 U3.3 | length 87
  Top Copper w0.2: J16.7@35.052,58.039 35.179,58.166 J3.1 ; U3.3 50.687,70.684 50.687,69.213 v3(50.7,69.2)
  Top Copper w0.254: U1.5 81.373,77.216 82.007,77.85 ; U1.6 81.371,78.486 82.007,77.85 ; J10.1 82.007,77.85
  Bottom Copper w0.2: J3.1 39.536,58.332 40.432,58.332 50.7,68.6 v3(50.7,69.2) 50.816,69.2 51.693,68.323 55.784,68.323 57.103,69.642 61.174,69.642 67.671,63.145 67.671,61.477 75.01,54.138 75.89,54.138 79.543,57.791 79.543,73.943 J10.1
HALLCHECK: J2.1 J9.1 J16.4 R19.2 U3.1 U5.8 | length 51.9
  Top Copper w0.254: J16.4@34.726,65.606 J16.4 39.222,65.68 J2.1 ; v3(52.1,69.2) 52.979,69.2 53.213,69.434 U3.1@53.213,70.347 ; U3.1 U3.1@53.213,70.347 ; J9.1 59.309,66.702 U5.8 58.986,66.675 56.08,69.581 R19.2 53.979,69.581 U3.1@53.213,70.347
  Bottom Copper w0.254: J2.1 43.266,69.428 43.266,76.938 46.92,80.591 49.409,80.591 53.7,76.3 53.7,69.8 53.1,69.2 v3(52.1,69.2)
HALLREF: R22.2 U3.2 | length 4.4
  Top Copper w0.254: R22.2 49.657,74.118 51.943,71.832 U3.2
INV_PC: U5.4 U5.13 | length 6.3
  Top Copper w0.2: U5.13 61.696,60.325 64.236,62.865 U5.4
LATCH_OUT: IC1.2 U6.6 U6.7 | length 13.6
  Top Copper w0.2: U6.6 U6.7 52.451,79.078 54.179,77.35 55.15,77.35 60.198,72.302 IC1.2
LATCH_RESET: IC1.3 U6.3 | length 20.8
  Top Copper w0.2: U6.3 51.181,83.044 51.775,82.45 56.125,82.45 57.875,80.7 57.875,75.687 60.628,72.934 60.628,72.225 61.468,71.385 IC1.3
LATCH_SET: IC1.4 U5.11 | length 9.8
  Top Copper w0.2: U5.11 59.686,62.865 60.875,64.054 60.875,68.8 62.36,70.285 62.513,70.285 62.738,70.51 IC1.4
NetC6_2: C6.2 R14.1 U6.1 | length 3.9
  Top Copper w0.254: U6.1 C6.2 R14.1
NetIC1_5: IC1.5 R15.1 | length 2.4
  Top Copper w0.2: IC1.5 64.008,70.51 64.5,70.018 64.5,69.35 ; R15.1 64.499,69.183 64.499,69.349 ; 64.499,69.349 64.5,69.35
NetJ1_9: J5.1 J12.1 J16.9 U6.5 | length 37.8
  Top Copper w0.254: J16.9@35.052,52.959 J5.1 ; J12.1 U6.5 U6.5
  Bottom Copper w0.254: J5.1 39.37,55.414 38.278,56.507 38.278,59.974 47.604,69.3 47.604,77.104 47.371,77.337 J12.1
NetR5_2: R5.2 U2.2 U4.3 | length 19.4
  Top Copper w0.2: R5.2 70.613,47.04 70.994,47.421 U2.2 70.994,48.799 69.172,50.621 68.925,50.621 67.168,52.378 67.168,54.78 68.663,56.275 71.175,56.275 71.771,56.871 U4.3
NetR6_2: R6.2 U2.14 U4.4 | length 10.3
  Top Copper w0.254: R6.2 68.11,52.765 U2.14 69.724,55.098 69.873,55.247 71.197,55.247 73.041,57.091 U4.4
NetR7_2: R7.2 U2.13 U4.5 | length 7.7
  Top Copper w0.254: U2.13 70.994,54.194 74.311,57.511 U4.5
NetR8_2: R8.2 U2.1 U4.2 | length 17.3
  Top Copper w0.2: R8.2 69.012,44.973 69.724,45.685 U2.1 69.724,49.326 68.832,50.218 68.758,50.218 66.765,52.211 66.765,54.995 70.501,58.731 U4.2
NetR9_2: R9.2 U1.2 U4.10 | length 15
  Top Copper w0.254: U4.10 74.311,64.681 77.222,67.592 77.222,70.588 80.039,73.406 U1.2 83.093,73.406 83.424,73.075 R9.2
NetR10_2: R10.2 U1.14 U4.11 | length 9.1
  Top Copper w0.254: U4.11 73.041,67.393 76.073,70.425 U1.14
NetR11_2: R11.2 U1.13 U4.12 | length 13
  Top Copper w0.254: U4.12 71.771,69.77 U1.13@75.407,73.406 ; R11.2 U1.13@75.407,73.406 ; U1.13 U1.13@75.407,73.406
NetR12_2: R12.2 U1.1 U4.9 | length 13
  Top Copper w0.254: U4.9 75.581,64.681 75.729,64.829 75.754,64.829 80.705,69.78 U1.1 82.712,72.136 83.424,71.424 R12.2
NetR16_3: R16.3 R17.1 | length 6
  Top Copper w0.2: R16.3 50.65,55.118 50.65,57.075 50.165,57.56 R17.1
NetR20_2: R20.2 R22.1 | length 2.5
  Top Copper w0.254: R22.1 53.888,73.168 54.272,73.552 54.827,73.552 R20.2
NetR21_2: R21.2 R23.1 | length 2.3
  Top Copper w0.2: R23.1 46.863,70.777 R21.2
NetR22_3: R22.3 R24.2 | length 2.6
  Top Copper w0.254: R24.2 51.775,77.175 52.465,76.485 52.515,76.485 52.907,76.093 R22.3
NetR23_3: R23.3 R25.2 | length 2.3
  Top Copper w0.2: R25.2 44.847,72.994 R23.3
PLAUS1: U4.1 U5.1 | length 4.7
  Top Copper w0.2: U5.1 69.205,59.055 U4.1
PLAUS2: U4.13 U5.2 | length 7.8
  Top Copper w0.2: U5.2 66.845,60.325 70.501,63.981 U4.13
PLAUSCHECK: U5.3 U5.5 U5.6 | length 4.8
  Top Copper w0.2: U5.3 64.936,61.595 65.514,62.173 65.514,63.238 64.586,64.166 U5.6
VCC: C8.2 J16.8 U7.1 | length 29
  Top Copper w1: J16.8 34.821,55.499 42.501,55.499 46,52 53.601,52 53.78,51.821 U7.1 53.78,47.851 C8.2
pads on no net: IC1.1 IC1.9 IC1.10 IC1.13 J16.10 R16.1 U4.6 U4.8

## Polygon pours and split planes (outlines as drawn)
GND on Top Copper "GND_L01_P004" (solid, pour order 4): 29,43 29,86 cw(c33,86) 33,90 85,90 cw(c85,86) 89,86 89,43 cw(c85,43) 85,39 33,39 cw(c33,43)
+5 on Top Copper "+5_L01_P000" (solid, pour order 0): 37.379,46 ccw(c39.5,46) 41.621,46 41.621,46.311 49.432,46.311 49.5,46.379 ccw(c49.5,48.5) 49.5,50.621 39.5,50.621 ccw(c39.5,48.5) 37.379,48.5
GND on Bottom Copper "GND_L04_P001" (solid, pour order 1): 29,43 29,86 cw(c33,86) 33,90 85,90 cw(c85,86) 89,86 89,43 cw(c85,43) 85,39 33,39 cw(c33,43)
GND on Signal Layer 1 "GND_L02_P002" (solid, pour order 2): 29,43 29,86 cw(c33,86) 33,90 85,90 cw(c85,86) 89,86 89,43 cw(c85,43) 85,39 33,39 cw(c33,43)
+5 on Signal Layer 2 "+5_L03_P003" (solid, pour order 3): 29,43 29,86 cw(c33,86) 33,90 85,90 cw(c85,86) 89,86 89,43 cw(c85,43) 85,39 33,39 cw(c33,43)

## Silkscreen, mask and mechanical layers (free items; w line width, h text height)
Top Overlay:
  drawing of 73 lines, arcs and shapes, not listed
  text "BSPD V1.1" at 59.654,85.954 h1.52
  text "MATHEWOS SAMSON" at 59.6,83.9 h1
  text "KENNESAW MOTORSPORTS FSAE" at 59.6,81.9 h1
Bottom Overlay:
  text "APPS2" at 48.746,72.254 h1.52
  text "BRAKECHECK" at 55.746,69.754 h1.52
  text "APPS1" at 47.746,67.254 h1.52
  text "HALLCHECK" at 54.246,64.754 h1.52
  text "BRAKE" at 48.246,62.254 h1.52
  text "GND" at 45.246,59.754 h1.52
  text "HALL" at 46.246,57.254 h1.52
  text "VCC (MAX 16V)" at 58.746,54.754 h1.52
  text "SDC OUT" at 50.746,52.254 h1.52
  text "NC" at 43.246,49.754 h1.52
Mechanical 1:
  lines w0.254: 49.432,46.311 41.621,46.311 41.621,46 cw(c39.5,46) 37.379,46 37.379,48.5 cw(c39.5,48.5) 39.5,50.621 49.5,50.621 cw(c49.5,48.5) 49.5,46.379 ; 29,43 ccw(c33,43) 33,39 85,39 ccw(c85,43) 89,43 89,86 ccw(c85,86) 85,90 33,90 ccw(c33,86) 29,86 29,43

## Text inside footprints (layer, text, board x,y; h text height)
J16: Top Overlay "1" at 36.5,73.49 h1.02 r270; Top Overlay "10" at 36.5,51.12 h1.02 r270